# EAGLE board Secondary (EAGLE 5.12), part 1 of 3
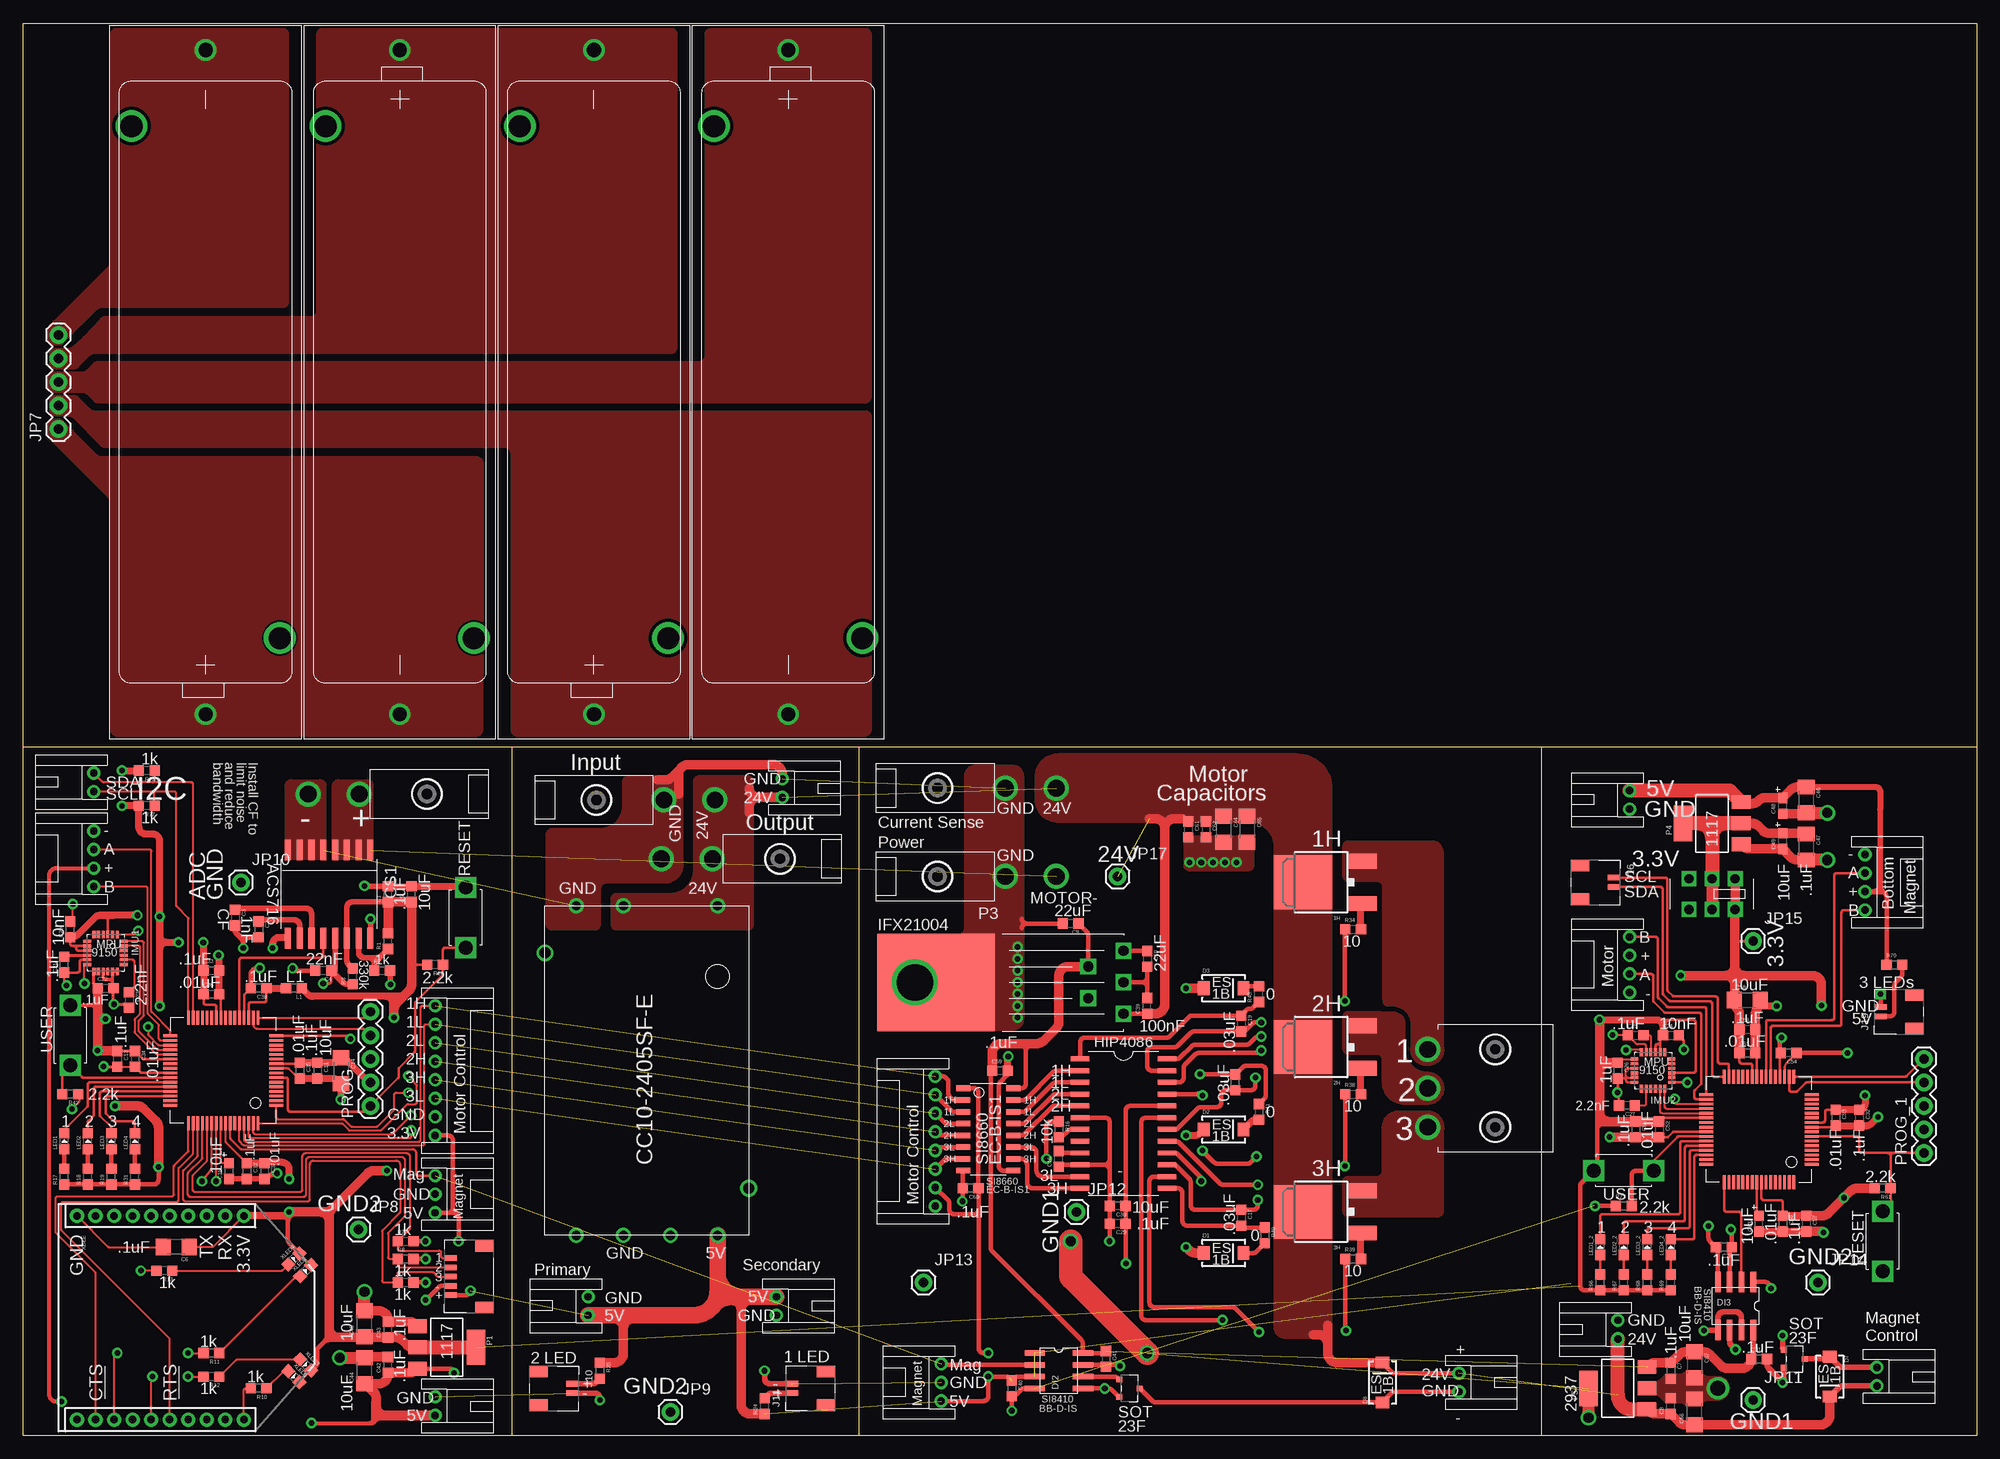
[diagram p0: board, top side]
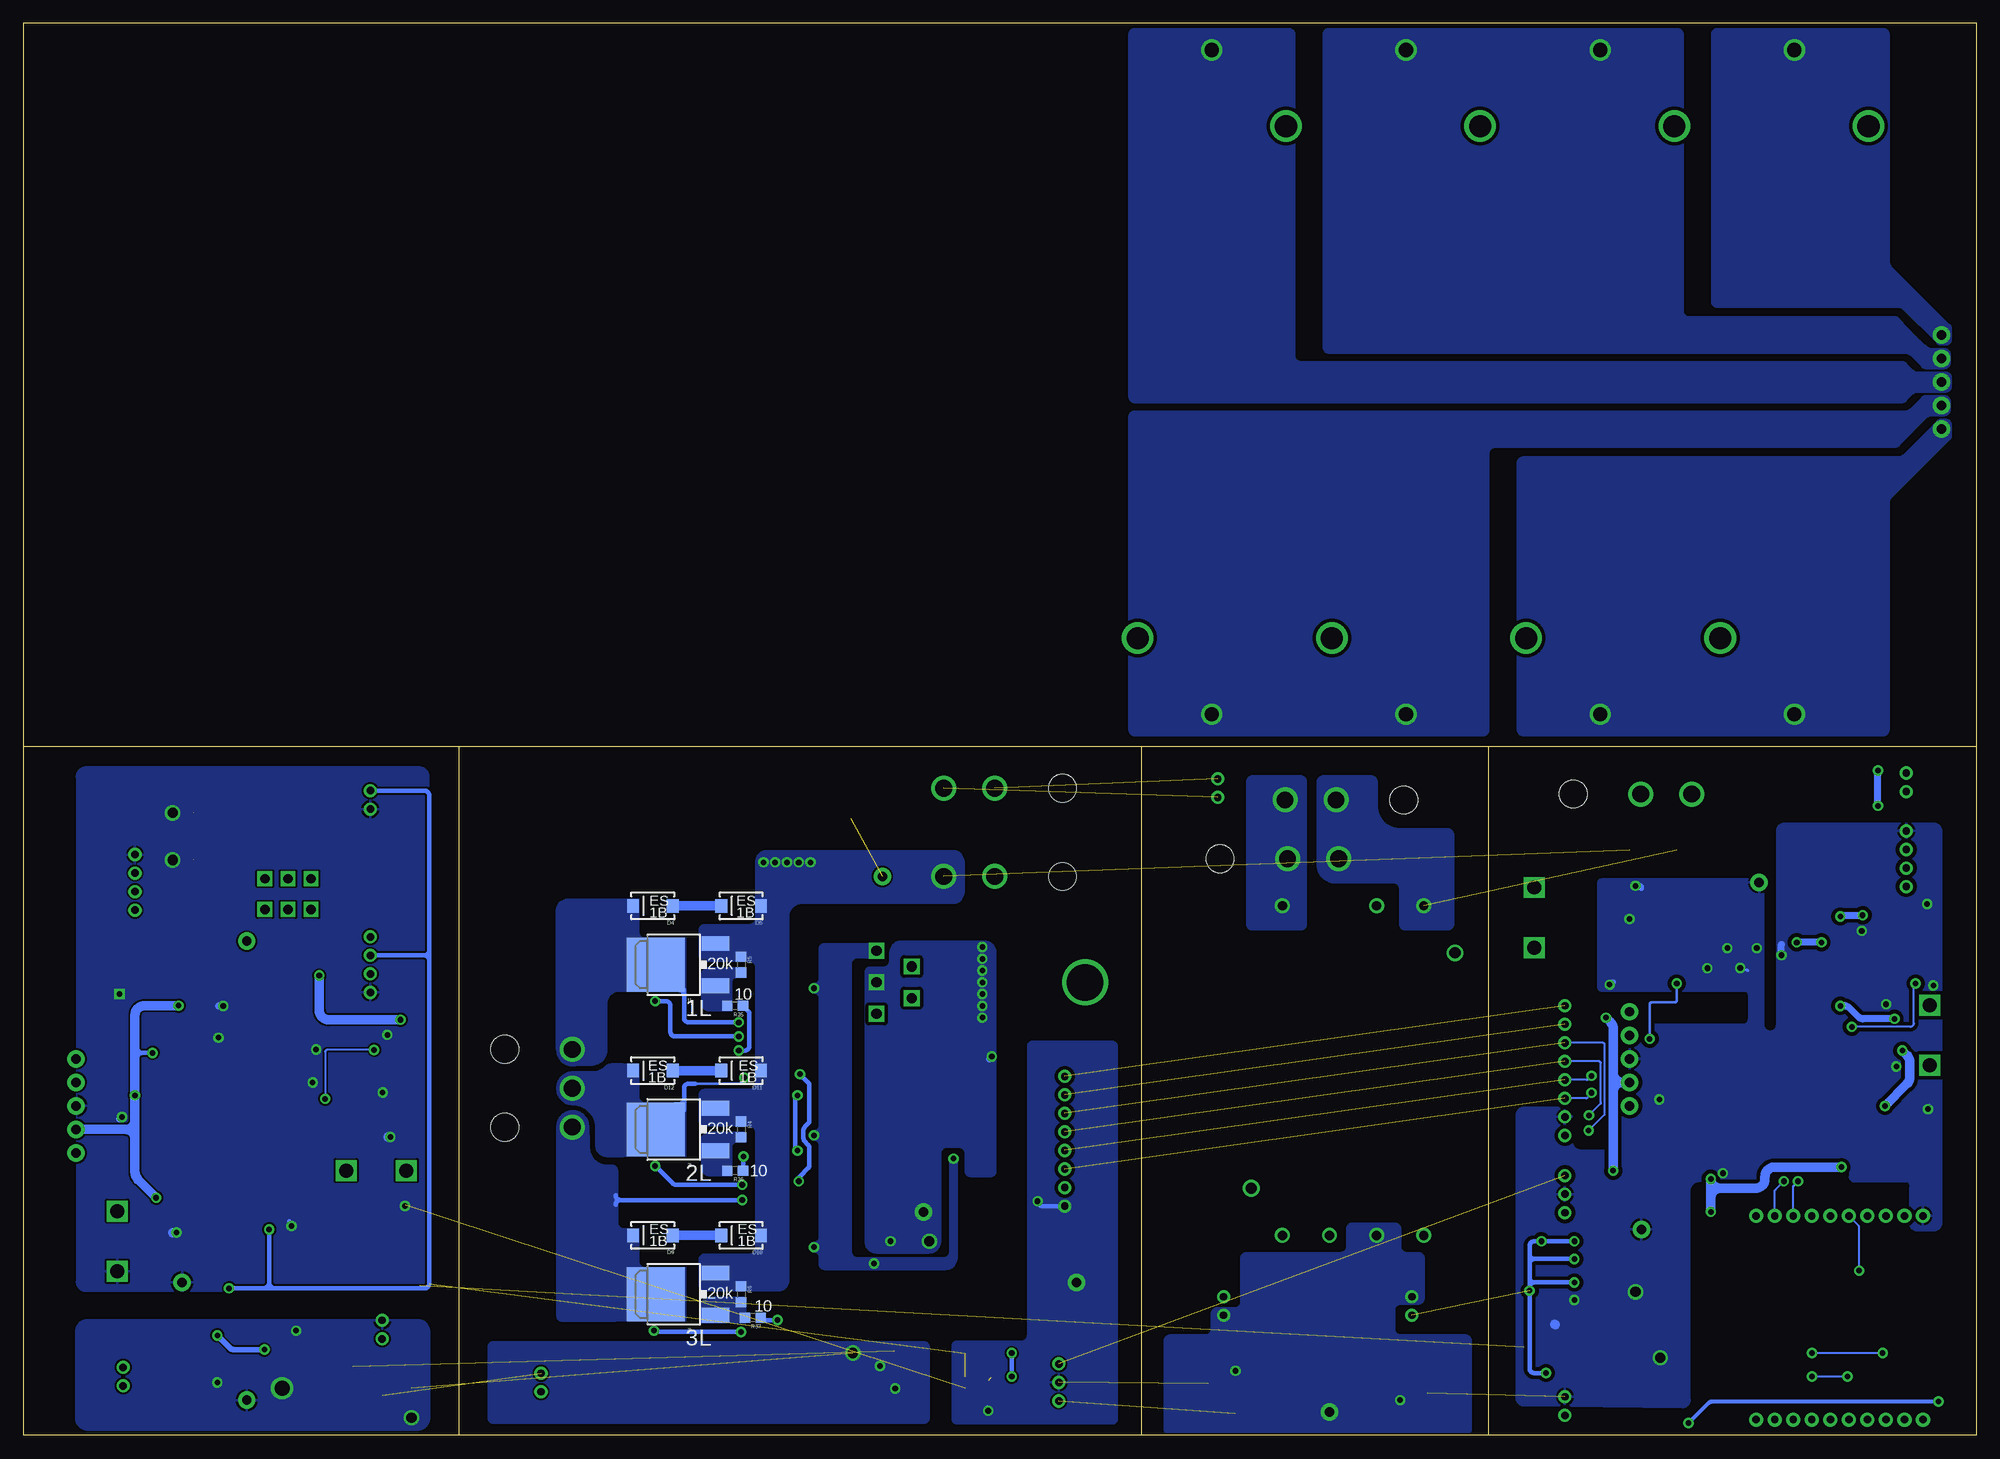
[diagram p1: board, bottom side, seen from below]

Size 210.82 x 152.4 mm. Coordinates in mm from the lower left corner, seen from the top.
Outline: 90.17,0 0,0 0,74.3
Outline: 90.17,0 163.83,0
Outline: 163.83,0 210.82,0 210.82,152.4 0,152.4 0,74.3
Outline: 0,74.3 52.7,74.3
Outline: 52.7,74.3 90.17,74.3
Outline: 90.17,74.3 163.83,74.3
Outline: 163.83,74.3 210.82,74.3
Outline: 163.83,74.3 163.83,0
Outline: 90.17,74.3 90.17,0
Outline: 52.7,74.3 52.7,0
Copper layers (1*4*8*16): Top 0.035mm / dielectric 0.15mm / M-Top 0.035mm / dielectric 0.15mm / M-Bottom 0.035mm / dielectric 0.15mm / Bottom 0.035mm
Design rules "Andrew *": minimum track width 8mil, minimum drill 20mil, track to track 8mil, track to pad 8mil, pad to pad 2mil, via to via 8mil, smd to smd 8mil, copper to edge 10mil, drill to drill 8mil, minimum pad ring 12mil, minimum via ring 10mil, stop-mask expansion 4mil, vias tented up to drill 25mil, thermal gap 10mil

## Footprints (pad centres in the part's own frame; a part is rotated, then mirrored left to right if it is on the bottom)
DPAK = smd 5.791 x 6.274: D 0,1.587 | smd 1.6 x 3: G -2.286,-4.851; S 2.286,-4.851
1043P = drill 1.524 round: + -35.839,0; - 35.839,0 | drill 2.388 round: P$1 -27.622,-8.001; P$2 27.622,8.001
0603 = smd 1.1 x 1.1: 1 -0.85,0; 2 0.85,0
1206 = smd 1.6 x 1.8: 1 -1.4,0; 2 1.4,0
0603-POL = smd 1.1 x 1: + 0.85,0; - -0.85,0
SOIC16-W = smd 0.65 x 2.25: 1 -4.445,-4.75; 2 -3.175,-4.75; 3 -1.905,-4.75; 4 -0.635,-4.75; 5 0.635,-4.75; 6 1.905,-4.75; 7 3.175,-4.75; 8 4.445,-4.75; 9 4.445,4.75; 10 3.175,4.75; 11 1.905,4.75; 12 0.635,4.75; 13 -0.635,4.75; 14 -1.905,4.75; 15 -3.175,4.75; 16 -4.445,4.75
SMA-DIODE@1 = smd 1.27 x 1.47: A -2.15,0; C 2.15,0
SOIC16-N = smd 0.6 x 1.55: 1 -4.445,-2.7; 2 -3.175,-2.7; 3 -1.905,-2.7; 4 -0.635,-2.7; 5 0.635,-2.7; 6 1.905,-2.7; 7 3.175,-2.7; 8 4.445,-2.7; 9 4.445,2.7; 10 3.175,2.7; 11 1.905,2.7; 12 0.635,2.7; 13 -0.635,2.7; 14 -1.905,2.7; 15 -3.175,2.7; 16 -4.445,2.7
SOIC8-N = smd 2.2 x 0.6: 1 -2.6,1.905; 2 -2.6,0.635; 3 -2.6,-0.635; 4 -2.6,-1.905; 5 2.6,-1.905; 6 2.6,-0.635; 7 2.6,0.635; 8 2.6,1.905
LGA24_4X4 = smd 0.8 x 0.35: 1 -2,1.25; 2 -2,0.75; 3 -2,0.25; 4 -2,-0.25; 5 -2,-0.75; 6 -2,-1.25; 13 2,-1.25; 14 2,-0.75; 15 2,-0.25; 16 2,0.25; 17 2,0.75; 18 2,1.25 | smd 0.35 x 0.85: 7 -1.25,-1.975; 8 -0.75,-1.975; 9 -0.25,-1.975; 10 0.25,-1.975; 11 0.75,-1.975; 12 1.25,-1.975; 19 1.25,1.975; 20 0.75,1.975; 21 0.25,1.975; 22 -0.25,1.975; 23 -0.75,1.975; 24 -1.25,1.975
JST-2-PH-TH = drill 0.8 round: 1 -1,-6.35; 2 1,-6.35
JST-4-PH-TH = drill 0.8 round: 1 -3,-6.35; 2 -1,-6.35; 3 1,-6.35; 4 3,-6.35
JST-8-PH-TH = drill 0.8 round: 1 -7,-6.35; 2 -5,-6.35; 3 -3,-6.35; 4 -1,-6.35; 5 1,-6.35; 6 3,-6.35; 7 5,-6.35; 8 7,-6.35
JST-3-PH-TH = drill 0.8 round: 1 -2,-6.35; 2 0,-6.35; 3 2,-6.35
JST-SH-5 = smd 0.6 x 1.35: 1 2,4.675; 2 1,4.675; 3 0,4.675; 4 -1,4.675; 5 -2,4.675 | smd 1.2 x 2: P$6 -3.3,1; P$7 3.3,1
JST-SH-2 = smd 0.6 x 1.35: 1 0.5,4.675; 2 -0.5,4.675 | smd 1.2 x 2: P$6 -1.8,1; P$7 1.8,1
MOLEX-2-MINIFITJR-RA = drill 1.803 round: 1 0,13.894; 2 0,19.406 | hole 3: 0,6.604
MOLEX-3-MINIFITJR-RA = drill 1.803 round: 1 4.191,13.538; 2 0,13.538; 3 -4.191,13.538 | hole 3: -4.204,6.248; 4.204,6.248
1X05 = drill 1.016 pad 1.88 round: 1 0,0; 2 2.54,0; 3 5.08,0; 4 7.62,0; 5 10.16,0
1X01 = drill 1.016 pad 1.88 round: 1 0,0
0603-DIODE = smd 1.1 x 1.1: AN -0.85,0; CAT 0.85,0
SOT23F = smd 0.6 x 0.65: D 0,1.125; G -0.95,-1.125; S 0.95,-1.125
SOIC24-W = smd 0.533 x 1.981: 1 -6.985,-4.686; 2 -5.715,-4.686; 3 -4.445,-4.686; 4 -3.175,-4.686; 5 -1.905,-4.686; 6 -0.635,-4.686; 7 0.635,-4.686; 8 1.905,-4.686; 9 3.175,-4.686; 10 4.445,-4.686; 11 5.715,-4.686; 12 6.985,-4.686; 13 6.985,4.686; 14 5.715,4.686; 15 4.445,4.686; 16 3.175,4.686; 17 1.905,4.686; 18 0.635,4.686; 19 -0.635,4.686; 20 -1.905,4.686; 21 -3.175,4.686; 22 -4.445,4.686; 23 -5.715,4.686; 24 -6.985,4.686
SOT223 = smd 1.499 x 2.007: 1 -2.261,-3.15; 2 0.025,-3.15; 3 2.311,-3.15 | smd 3.81 x 2.007: 4 0,3.15
CC10-2405SF-E = drill 1 round: 1 -17.78,7.62; 2 -17.78,-2.54; 3 -17.78,-7.62; 4 17.78,-7.62; 5 17.78,-2.54; 6 17.78,2.54; 7 17.78,7.62 | drill 1.2 round: P$1 12.7,11; P$2 -12.7,-11
TO220-5 = drill 1.1 square: 1 3.81,-3.404; 2 0,-1.702; 3 3.81,0; 4 0,1.702; 5 3.81,3.404 | smd 12.7 x 10.541: PAD -16.434,0 | drill 3.937 round: PAD2 -18.72,0
TQFP64_10X10 = smd 1.5 x 0.3: 1 -5.7,3.75; 2 -5.7,3.25; 3 -5.7,2.75; 4 -5.7,2.25; 5 -5.7,1.75; 6 -5.7,1.25; 7 -5.7,0.75; 8 -5.7,0.25; 9 -5.7,-0.25; 10 -5.7,-0.75; 11 -5.7,-1.25; 12 -5.7,-1.75; 13 -5.7,-2.25; 14 -5.7,-2.75; 15 -5.7,-3.25; 16 -5.7,-3.75; 33 5.7,-3.75; 34 5.7,-3.25; 35 5.7,-2.75; 36 5.7,-2.25; 37 5.7,-1.75; 38 5.7,-1.25; 39 5.7,-0.75; 40 5.7,-0.25; 41 5.7,0.25; 42 5.7,0.75; 43 5.7,1.25; 44 5.7,1.75; 45 5.7,2.25; 46 5.7,2.75; 47 5.7,3.25; 48 5.7,3.75 | smd 0.3 x 1.5: 17 -3.75,-5.7; 18 -3.25,-5.7; 19 -2.75,-5.7; 20 -2.25,-5.7; 21 -1.75,-5.7; 22 -1.25,-5.7; 23 -0.75,-5.7; 24 -0.25,-5.7; 25 0.25,-5.7; 26 0.75,-5.7; 27 1.25,-5.7; 28 1.75,-5.7; 29 2.25,-5.7; 30 2.75,-5.7; 31 3.25,-5.7; 32 3.75,-5.7; 49 3.75,5.7; 50 3.25,5.7; 51 2.75,5.7; 52 2.25,5.7; 53 1.75,5.7; 54 1.25,5.7; 55 0.75,5.7; 56 0.25,5.7; 57 -0.25,5.7; 58 -0.75,5.7; 59 -1.25,5.7; 60 -1.75,5.7; 61 -2.25,5.7; 62 -2.75,5.7; 63 -3.25,5.7; 64 -3.75,5.7
TACTILE_SWITCH = drill 1.5 square: 1 -3.25,0; 2 3.25,0
SLIDE_SWITCH = drill 1 square: 1 -2.489,1.651; 2 0,1.651; 3 2.489,1.651; 4 2.489,-1.651; 5 0,-1.651; 6 -2.489,-1.651
XBEE-SILK = drill 0.8 pad 1.524 round: 1 -11,20; 2 -11,18; 3 -11,16; 4 -11,14; 5 -11,12; 6 -11,10; 7 -11,8; 8 -11,6; 9 -11,4; 10 -11,2; 11 11,2; 12 11,4; 13 11,6; 14 11,8; 15 11,10; 16 11,12; 17 11,14; 18 11,16; 19 11,18; 20 11,20

## Placement (x,y rotation side)
1H  IRLR024  [DPAK]  139.7,59.69 90 top
1L  IRLR024  [DPAK]  140.97,50.8 90 bottom
2H  IRLR024  [DPAK]  139.7,41.91 90 top
2L  IRLR024  [DPAK]  140.97,33.02 90 bottom
3H  IRLR024  [DPAK]  139.7,24.13 90 top
3L  IRLR024  [DPAK]  140.97,15.24 90 bottom
BAT1  BATTERY-18650HOLDER  [1043P]  19.68,113.67 90 top
BAT2  BATTERY-18650HOLDER  [1043P]  40.64,113.67 270 top
BAT3  BATTERY-18650HOLDER  [1043P]  61.59,113.67 90 top
BAT4  BATTERY-18650HOLDER  [1043P]  82.55,113.67 270 top
C1  .1uF  [0603]  39.37,58.42 90 top
C2  1nF  [0603]  25.4,54.61 270 top
C3  7nF  [0603]  22.86,55.88 270 top
C4  22nF  [0603]  32.38,50.16 180 top
C5  10uF  [0603]  41.91,58.42 90 top
C6  .1uF  [1206]  16.51,20.32 180 top
C7  .1uF 24V  [0603]  177.8,6.99 270 top
C8  .1uF 24V  [0603]  177.8,3.17 90 top
C9  22uF  [0603]  113.03,55.24 180 top
C10  22uF 15V  [0603]  121.28,51.44 270 top
C11  .1uF  [0603]  31.75,39.37 270 top
C12  .1uF  [0603]  24.13,28.52 270 top
C13  .1uF  [0603]  10.16,40.64 270 top
C14  10uF  [1206]  34.29,39.37 270 top
C15  10uF  [0603-POL]  22.23,28.52 90 top
C16  DNI  [0603]  111.76,29.84 90 top
C17  .03uF 15V  [0603]  131.44,23.5 270 top
C18  .03uF 15V  [0603]  130.81,38.1 90 top
C19  .03uF 15V  [0603]  131.44,44.45 270 top
C20  10nF  [0603]  5.08,54.61 90 top
C21  .1uF  [0603]  4.45,50.8 90 top
C22  .1uF  [0603]  8.89,48.26 0 top
C23  2.2nF  [0603]  11.43,46.99 270 top
C24  10nF  [0603]  177.8,43.18 0 top
C25  .1uF  [0603]  173.99,43.18 0 top
C26  .1uF  [0603]  172.09,39.37 270 top
C27  2.2nF  [0603]  173.05,35.61 180 top
C28  .1uF  [0603]  183.51,20.32 180 top
C29  .1uF  [0603]  118.11,22.86 180 top
C30  10uF  [0603]  118.11,24.77 180 top
C31  .1uF  [0603]  187.32,8.26 0 top
C32  .1uF  [0603]  198.12,34.29 270 top
C33  .1uF  [0603]  20.32,50.16 0 top
C34  .01uF  [0603]  12.06,40.64 270 top
C35  .01uF  [0603]  29.84,39.37 270 top
C36  .01uF  [0603]  20.32,47.62 0 top
C37  .01uF  [0603]  26.04,28.52 270 top
C38  .1uF  [0603]  25.4,48.26 180 top
C39  .1uF 48V  [0603]  121.28,46.35 90 top
C40  .1uF  [0603]  106.68,5.08 270 top
C41  .1uF  [0603]  116.84,8.26 270 top
C42  .1uF  [0603]  39.37,7.62 90 top
C43  .1uF  [0603]  39.37,11.43 90 top
C44  10uF  [1206]  36.83,6.99 90 top
C45  10uF  [1206]  36.83,12.06 90 top
C46  .1uF  [1206]  192.41,68.58 270 top
C47  .1uF  [1206]  192.41,63.5 270 top
C48  10uF  [0603-POL]  189.87,67.94 90 top
C49  10uF  [0603-POL]  189.87,64.14 90 top
C50  .01uF  [0603]  189.87,22.86 270 top
C51  .01uF  [0603]  186.06,41.27 0 top
C52  .01uF  [0603]  176.53,33.02 270 top
C53  .01uF  [0603]  195.58,34.29 270 top
C54  .1uF  [0603]  190.5,41.27 180 top
C55  .1uF  [0603]  173.99,33.02 270 top
C56  .1uF  [0603]  186.06,43.81 0 top
C57  .1uF  [0603]  192.41,22.86 270 top
C58  10uF  [1206]  186.06,46.99 0 top
C59  .1uF  [0603]  105.41,39.37 0 top
C60  .1uF  [0603]  102.23,26.67 180 top
C61  .01uF  [0603]  125.73,65.41 270 top
C62  .1uF  [0603]  127.64,65.41 270 top
C63  10uF  [0603-POL]  187.32,22.86 90 top
C64  1uF  [1206]  129.54,65.41 270 top
C65  10uF  [1206]  132.08,65.41 270 top
C66  10uF 24V  [1206]  180.34,2.54 90 top
C67  10uF 24V  [1206]  180.34,7.62 270 top
CS1  ACS716KLATR-6BB-T  [SOIC16-W]  33.02,58.42 180 top
D1  ES1B  [SMA-DIODE@1]  129.54,19.68 0 top
D2  ES1B  [SMA-DIODE@1]  129.54,33.02 0 top
D3  ES1B  [SMA-DIODE@1]  129.54,48.26 0 top
D4  ES1B  [SMA-DIODE@1]  142.88,57.15 180 bottom
D5  ES1B  [SMA-DIODE@1]  133.35,57.15 180 bottom
D7  ES1B  [SMA-DIODE@1]  194.94,6.35 270 top
D8  ES1B  [SMA-DIODE@1]  146.69,5.71 90 top
D9  ES1B  [SMA-DIODE@1]  142.88,21.59 180 bottom
D10  ES1B  [SMA-DIODE@1]  133.35,21.59 180 bottom
D11  ES1B  [SMA-DIODE@1]  133.35,39.37 180 bottom
D12  ES1B  [SMA-DIODE@1]  142.88,39.37 180 bottom
DI1  DIGITAL-ISOLATOR-6CH  [SOIC16-N]  104.14,33.02 270 top
DI2  DIGITAL-ISOLATOR-1CHSOIC8-N  [SOIC8-N]  111.76,6.99 0 top
DI3  DIGITAL-ISOLATOR-1CHSOIC8-N  [SOIC8-N]  184.78,13.97 270 top
IMU1  MPU-9150  [LGA24_4X4]  8.89,52.07 270 top
IMU2  MPU-9150  [LGA24_4X4]  175.9,39.37 180 top
J1  [JST-2-PH-TH]  1.27,70.48 90 top
J2  [JST-4-PH-TH]  1.27,62.23 90 top
J3  MO8JST-SH-TH  [JST-8-PH-TH]  50.8,39.37 270 top
J4  [JST-3-PH-TH]  50.8,26.04 270 top
J5  [JST-SH-5]  50.8,17.14 90 top
J6  [JST-2-PH-TH]  50.8,3.17 270 top
J7  [JST-2-PH-TH]  88.27,69.85 270 top
J8  [JST-2-PH-TH]  54.61,13.97 90 top
J9  [JST-2-PH-TH]  87.63,13.97 270 top
J10  [JST-SH-2]  54.61,5.08 270 top
J11  [JST-SH-2]  87.63,5.08 90 top
J12  MO8JST-SH-TH  [JST-8-PH-TH]  92.08,31.75 90 top
J13  [JST-3-PH-TH]  92.71,5.71 90 top
J14  [JST-2-PH-TH]  161.29,5.71 270 top
J15  [JST-2-PH-TH]  167,68.58 90 top
J16  [JST-SH-2]  167,59.69 270 top
J17  [JST-4-PH-TH]  205.1,59.69 270 top
J18  [JST-4-PH-TH]  167,50.8 90 top
J19  [JST-SH-2]  205.1,45.72 90 top
J20  [JST-2-PH-TH]  165.74,11.43 90 top
J21  [JST-2-PH-TH]  206.38,6.35 270 top
JP1  [MOLEX-2-MINIFITJR-RA]  50.16,69.22 90 top
JP2  [MOLEX-2-MINIFITJR-RA]  55.24,68.58 270 top
JP3  [MOLEX-2-MINIFITJR-RA]  88.27,62.23 90 top
JP4  [MOLEX-2-MINIFITJR-RA]  92.08,69.85 270 top
JP5  [MOLEX-2-MINIFITJR-RA]  92.08,60.33 270 top
JP6  [MOLEX-3-MINIFITJR-RA]  165.1,37.47 90 top
JP7  [1X05]  3.81,108.58 90 top
JP8  M01PTH  [1X01]  36.2,22.23 0 top
JP9  M01PTH  [1X01]  69.85,2.54 0 top
JP10  M01PTH  [1X01]  23.5,59.69 0 top
JP11  M01PTH  [1X01]  186.69,3.81 0 top
JP12  M01PTH  [1X01]  113.67,24.13 0 top
JP13  M01PTH  [1X01]  97.16,16.51 0 top
JP14  M01PTH  [1X01]  193.68,16.51 0 top
JP15  M01PTH  [1X01]  186.69,53.34 0 top
JP17  M01PTH  [1X01]  118.11,60.33 0 top
L1  0ohm  [0603]  29.21,48.26 180 top
LED1  [0603-DIODE]  4.45,31.75 90 top
LED1_2  [0603-DIODE]  170.18,20.32 90 top
LED2  [0603-DIODE]  6.99,31.75 90 top
LED2_2  [0603-DIODE]  172.72,20.32 90 top
LED3  [0603-DIODE]  9.53,31.75 90 top
LED3_2  [0603-DIODE]  175.26,20.32 90 top
LED4  [0603-DIODE]  12.06,31.75 90 top
LED4_2  [0603-DIODE]  177.8,20.32 90 top
M1  N-MOSSOT23F  [SOT23F]  119.38,5.08 270 top
M2  N-MOSSOT23F  [SOT23F]  191.13,8.26 270 top
MD1  HIP4086  [SOIC24-W]  118.75,33.66 270 top
P1  LINEAR-REGREG1117  [SOT223]  45.72,9.53 270 top
P2  CC10-2405SF-E  [CC10-2405SF-E]  67.31,39.37 270 top
P3  IFX21004TNV51  [TO220-5]  114.94,48.9 0 top
P4  LINEAR-REGREG1117  [SOT223]  182.25,66.04 90 top
P5  LINEAR-REGLM2937  [SOT223]  172.09,5.08 90 top
PIC1  DSPIC33EP512MC806  [TQFP64_10X10]  21.59,39.37 180 top
PIC2  DSPIC33EP512MC806  [TQFP64_10X10]  187.32,33.02 180 top
PROG  [1X05]  37.47,35.56 90 top
PROG_1  [1X05]  205.1,30.48 90 top
R1  2k  [0603]  39.37,53.34 90 top
R2  1k  [0603]  38.73,50.16 0 top
R3  330k  [0603]  35.56,49.53 90 top
R4  20k  [0603]  133.35,33.02 270 bottom
R5  20k  [0603]  133.35,50.8 270 bottom
R6  20k  [0603]  133.35,15.24 270 bottom
R7  1k  [0603]  41.27,20.95 0 top
R8  1k  [0603]  41.27,19.05 0 top
R9  1k  [0603]  41.27,16.51 0 top
R10  1k  [0603]  25.4,5.08 180 top
R11  1k  [0603]  20.32,8.89 180 top
R12  1k  [0603]  20.32,6.35 180 top
R13  1k  [0603]  15.24,17.78 180 top
R14  2.2k  [0603]  44.45,50.8 180 top
R16  10k  [0603]  111.76,33.02 270 top
R17  1k  [0603]  4.45,27.94 90 top
R18  1k  [0603]  6.99,27.94 90 top
R19  1k  [0603]  9.53,27.94 90 top
R24  47  [0603]  80.01,3.17 90 top
R25  22  [0603]  62.23,6.99 270 top
R31  1k  [0603]  12.06,27.94 90 top
R34  10ohm  [0603]  143.51,54.61 0 top
R35  10ohm  [0603]  133.99,46.35 180 bottom
R36  10ohm  [0603]  133.99,28.57 180 bottom
R37  10ohm  [0603]  132.08,12.7 180 bottom
R38  10ohm  [0603]  143.51,36.83 0 top
R39  10ohm  [0603]  143.51,19.05 0 top
R40  0ohm  [0603]  133.99,21.59 270 top
R41  0ohm  [0603]  133.35,34.92 270 top
R42  2.2k  [0603]  5.08,36.83 180 top
R43  0ohm  [0603]  133.35,47.62 90 top
R61  2.2k  [0603]  200.66,26.67 180 top
R66  1k  [0603]  170.18,16.51 90 top
R67  1k  [0603]  172.72,16.51 90 top
R68  1k  [0603]  175.26,16.51 90 top
R69  1k  [0603]  177.8,16.51 90 top
R70  3.3  [0603]  201.93,50.8 0 top
R73  2.2k  [0603]  172.72,24.77 0 top
R77  1k  [0603]  13.34,67.94 180 top
R78  1k  [0603]  13.34,71.75 180 top
RESET1  TACTILE_SWITCH  [TACTILE_SWITCH]  47.75,55.88 90 top
RESET2  TACTILE_SWITCH  [TACTILE_SWITCH]  200.66,20.95 270 top
SW1  SLIDE_SWTHROUGHHOLE  [SLIDE_SWITCH]  182.25,58.42 180 top
USER1  TACTILE_SWITCH  [TACTILE_SWITCH]  5.08,43.18 270 top
USER_2  TACTILE_SWITCH  [TACTILE_SWITCH]  172.72,28.57 0 top
XBEE  XBEE-1B2  [XBEE-SILK]  3.81,12.7 270 top
XLED1  [0603-DIODE]  29.21,6.35 315 top
XLED2  [0603-DIODE]  30.48,17.78 45 top
XLED3  [0603-DIODE]  30.48,7.62 315 top
XLED4  [0603-DIODE]  29.21,19.05 45 top

## Library data of the parts
1H 1L 2H 2L 3H 3L BAT1-BAT4 C1-C67 CS1 D1-D5 D7-D12 DI1-DI3 IMU1 IMU2 J1-J21 JP1-JP15 JP17 L1 LED1 LED1_2 LED2 LED2_2 LED3 LED3_2 LED4 LED4_2 M1 M2 MD1 P1-P5 PIC1 PIC2 PROG PROG_1 R1-R14 R16-R19 R24 R25 R31 R34-R43 R61 R66-R70 R73 R77 R78 RESET1 RESET2 USER1 USER_2 XBEE XLED1-XLED4 = Gibbot v4
SW1 = Gibbot

## Nets
1: BAT1.- JP7.5
1HO: 1H.G R34.2
1HS: 1H.S 1L.D C19.2 D4.C JP6.1 MD1.23
1LO: 1L.G R5.2 R35.2
2: BAT2.+ BAT3.- JP7.4
2HO: 2H.G R38.2
2HS: 2H.S 2L.D C18.1 D12.C JP6.2 MD1.18
2LO: 2L.G R4.2 R36.2
3: BAT4.+ JP7.3
3.3V: C1.1 C5.1 C6.1 C11.1 C12.1 C13.1 C14.1 C20.1 C22.1 C24.1 C26.1 C32.1 C33.1 C34.1 C35.1 C36.1 C37.1 C43.1 C45.1 C50.1 C51.1 C52.1 C53.1 C54.1 C55.1 C56.1 C57.1 C58.1 CS1.14 IMU1.3 IMU1.8 IMU1.9 IMU1.13 IMU2.3 IMU2.8 IMU2.9 IMU2.13 JP15.1 L1.1 P1.2 P1.4 PIC1.10 PIC1.26 PIC1.38 PIC1.57 PIC2.10 PIC2.19 PIC2.26 PIC2.38 PIC2.57 PROG.2 PROG_1.2 R1.2 R3.2 R14.2 R17.1 R18.1 R19.1 R31.1 R61.2 R66.1 R67.1 R68.1 R69.1 R77.2 R78.2 SW1.1 SW1.6 USER1.1 USER_2.1 XBEE.1 XLED1.CAT XLED2.CAT XLED3.CAT XLED4.CAT
3HO: 3H.G R39.2
3HS: 3H.S 3L.D C17.1 D9.C JP6.3 MD1.15
3LO: 3L.G R6.2 R37.2
4: BAT3.+ BAT4.- JP7.2
5: BAT1.+ BAT2.- JP7.1
5V1: C7.1 C9.1 C31.1 C41.1 C59.1 C67.1 DI1.16 DI2.8 DI3.8 P3.4 P5.3
5V2: C28.1 C40.1 C42.1 C44.1 C46.1 C48.+ C60.1 DI1.1 DI2.1 DI2.3 DI3.1 DI3.3 J2.2 J3.8 J4.3 J5.5 J6.2 J8.1 J9.1 J12.2 J13.1 J15.2 J17.3 J18.3 P1.3 P2.7 P4.3 R7.2 R8.2 R9.2 R24.1 R25.1 R70.1
15V: C10.1 C29.1 C30.1 D1.A D2.A D3.A MD1.20 P3.5 R16.1
24V: 1H.D 2H.D 3H.D C8.1 C39.1 C61.1 C62.1 C64.1 C65.1 C66.1 D7.C D8.C J7.2 J14.1 J20.1 J21.2 JP2.2 JP3.1 JP4.2 JP17.1 P2.1 P2.2 P3.1 P5.1
CTS: PIC1.49 XBEE.12
FAULT: C4.1 CS1.13 PIC1.16 R3.1
GND1: C7.2 C8.2 C9.2 C10.2 C16.1 C29.2 C30.2 C31.2 C39.2 C41.2 C59.2 C66.2 C67.2 CS1.5 CS1.6 CS1.7 CS1.8 DI1.9 DI2.5 DI2.7 DI3.5 DI3.7 J7.1 J20.2 JP1.2 JP2.1 JP3.2 JP4.1 JP5.1 JP11.1 JP12.1 M1.S M2.S MD1.6 MD1.10 P2.3 P3.3 P3.PAD P3.PAD2 P5.2 P5.4
GND2: C1.2 C2.2 C3.2 C4.2 C5.2 C6.2 C11.2 C12.2 C13.2 C14.2 C15.- C20.2 C21.1 C22.2 C23.2 C24.2 C25.1 C26.2 C27.2 C28.2 C32.2 C33.2 C34.2 C35.2 C36.2 C37.2 C38.2 C40.2 C42.2 C43.2 C44.2 C45.2 C46.2 C47.2 C48.- C49.- C50.2 C51.2 C52.2 C53.2 C54.2 C55.2 C56.2 C57.2 C58.2 C60.2 C63.- CS1.9 CS1.16 DI1.8 DI2.4 DI3.4 IMU1.1 IMU1.11 IMU1.15 IMU1.17 IMU1.18 IMU2.1 IMU2.11 IMU2.15 IMU2.17 IMU2.18 J2.4 J3.7 J4.2 J5.4 J6.1 J8.2 J9.2 J10.1 J11.1 J12.1 J13.2 J15.1 J17.1 J18.1 J19.1 JP8.1 JP9.1 JP10.1 JP13.1 JP14.1 P1.1 P2.5 P4.1 PIC1.9 PIC1.20 PIC1.25 PIC1.41 PIC2.9 PIC2.20 PIC2.25 PIC2.41 PROG.3 PROG_1.3 R2.2 R42.1 R73.1 RESET1.2 RESET2.2 XBEE.10
HALL1: J5.1 PIC1.53 R7.1
HALL2: J5.2 PIC1.52 R8.1
HALL3: J5.3 PIC1.51 R9.1
I_SENSE: CS1.12 PIC1.21
IMU_INT1: IMU1.12 PIC1.35
IMU_INT2: IMU2.12 PIC2.35
LED1: LED1.CAT PIC1.43
LED1_2: LED1_2.CAT PIC2.43
LED2: LED2.CAT PIC1.44
LED2_2: LED2_2.CAT PIC2.44
LED3: LED3.CAT PIC1.45
LED3_2: LED3_2.CAT PIC2.45
LED4: LED4.CAT PIC1.46
LED4_2: LED4_2.CAT PIC2.46
LOW_MAG: DI3.2 PIC2.49
LOW_MAG_2: DI3.6 M2.G
LOW_MAGA: J17.2 PIC2.23
LOW_MAGB: J17.4 PIC2.22
MCLR1: PIC1.7 PROG.1 R14.1 RESET1.1
MCLR_2: PIC2.7 PROG_1.1 R61.1 RESET2.1
MOTA: J18.2 PIC2.34
MOTB: J18.4 PIC2.33
MOTOR-: 1L.S 2L.S 3L.S C61.2 C62.2 C64.2 C65.2 CS1.1 CS1.2 CS1.3 CS1.4 D5.A D10.A D11.A JP1.1 JP5.2 R4.1 R5.1 R6.1
N$2: MD1.7 R16.2
N$3: C16.2 MD1.9
N$4: R11.2 XBEE.13
N$5: CS1.15 R1.1 R2.1
N$7: C2.1 CS1.10
N$8: C3.1 CS1.11
N$9: R10.2 XBEE.20
N$10: R10.1 XLED1.AN
N$11: LED1.AN R17.2
N$12: LED2.AN R18.2
N$13: LED3.AN R19.2
N$15: C38.1 L1.2 PIC1.19
N$16: C15.+ PIC1.56
N$17: LED4.AN R31.2
N$18: J11.2 R24.2
N$19: J10.2 R25.2
N$20: C47.1 C49.+ P4.2 P4.4 SW1.2 SW1.5
N$21: C25.2 IMU2.10
N$22: C27.1 IMU2.20
N$24: C21.2 IMU1.10
N$25: C23.1 IMU1.20
N$26: MD1.24 R34.1
N$27: R11.1 XLED2.AN
N$30: R12.2 XBEE.15
N$31: R12.1 XLED3.AN
N$32: R13.2 XBEE.6
N$35: MD1.22 R35.1
N$36: MD1.21 R36.1
N$37: MD1.19 R37.1
N$38: MD1.17 R38.1
N$39: R13.1 XLED4.AN
N$48: MD1.14 R39.1
N$50: C17.2 MD1.13 R40.1
N$52: C18.2 MD1.16 R41.1
N$54: C19.1 MD1.1 R43.1
N$55: D3.C R43.2
N$57: D8.A J14.2 M1.D
N$58: D2.C R41.2
N$59: D1.C R40.2
N$60: D4.A D5.C
N$61: D9.A D10.C
N$62: D11.C D12.A
N$63: D7.A J21.1 M2.D
N$104: C63.+ PIC2.56
N$108: LED1_2.AN R66.2
N$109: LED2_2.AN R67.2
N$110: LED3_2.AN R68.2
N$111: LED4_2.AN R69.2
N$112: J19.2 R70.2
PGEC1: PIC1.17 PROG.5
PGEC1_2: PIC2.17 PROG_1.5
PGED1: PIC1.18 PROG.4
PGED1_2: PIC2.18 PROG_1.4
PWM1H: DI1.2 J3.1 J12.8 PIC1.61
PWM1HO: DI1.15 MD1.2
PWM1L: DI1.3 J3.2 J12.7 PIC1.60
PWM1LO: DI1.14 MD1.3
PWM2H: DI1.5 J3.4 J12.5 PIC1.63
PWM2HO: DI1.12 MD1.5
PWM2L: DI1.4 J3.3 J12.6 PIC1.62
PWM2LO: DI1.13 MD1.4
PWM3H: DI1.7 J3.6 J12.3 PIC1.1
PWM3HO: DI1.10 MD1.12
PWM3L: DI1.6 J3.5 J12.4 PIC1.64
PWM3LO: DI1.11 MD1.11
RTS: PIC1.50 XBEE.16
RX: PIC1.55 XBEE.2
SCL1: IMU1.23 PIC1.37
SCL1_2: IMU2.23 PIC2.37
SCL2: J1.1 PIC1.32 R77.1
SCL2_2: J16.2 PIC2.31
SDA1: IMU1.24 PIC1.36
SDA1_2: IMU2.24 PIC2.36
SDA2: J1.2 PIC1.31 R78.1
SDA2_2: J16.1 PIC2.32
TOP_MAG: DI2.2 J4.1 J13.3 PIC1.58
TOP_MAGA: J2.3 PIC1.33
TOP_MAGB: J2.1 PIC1.34
TOP_MAGO: DI2.6 M1.G
TX: PIC1.54 XBEE.3
USER: PIC1.42 R42.2 USER1.2
USER2: R73.2 USER_2.2
USER_2: PIC2.42